# EAGLE board SparkFun_Tranceiver_Breakout-nRF24L01_Panel_v13 (EAGLE 7.4.0), part 1 of 4
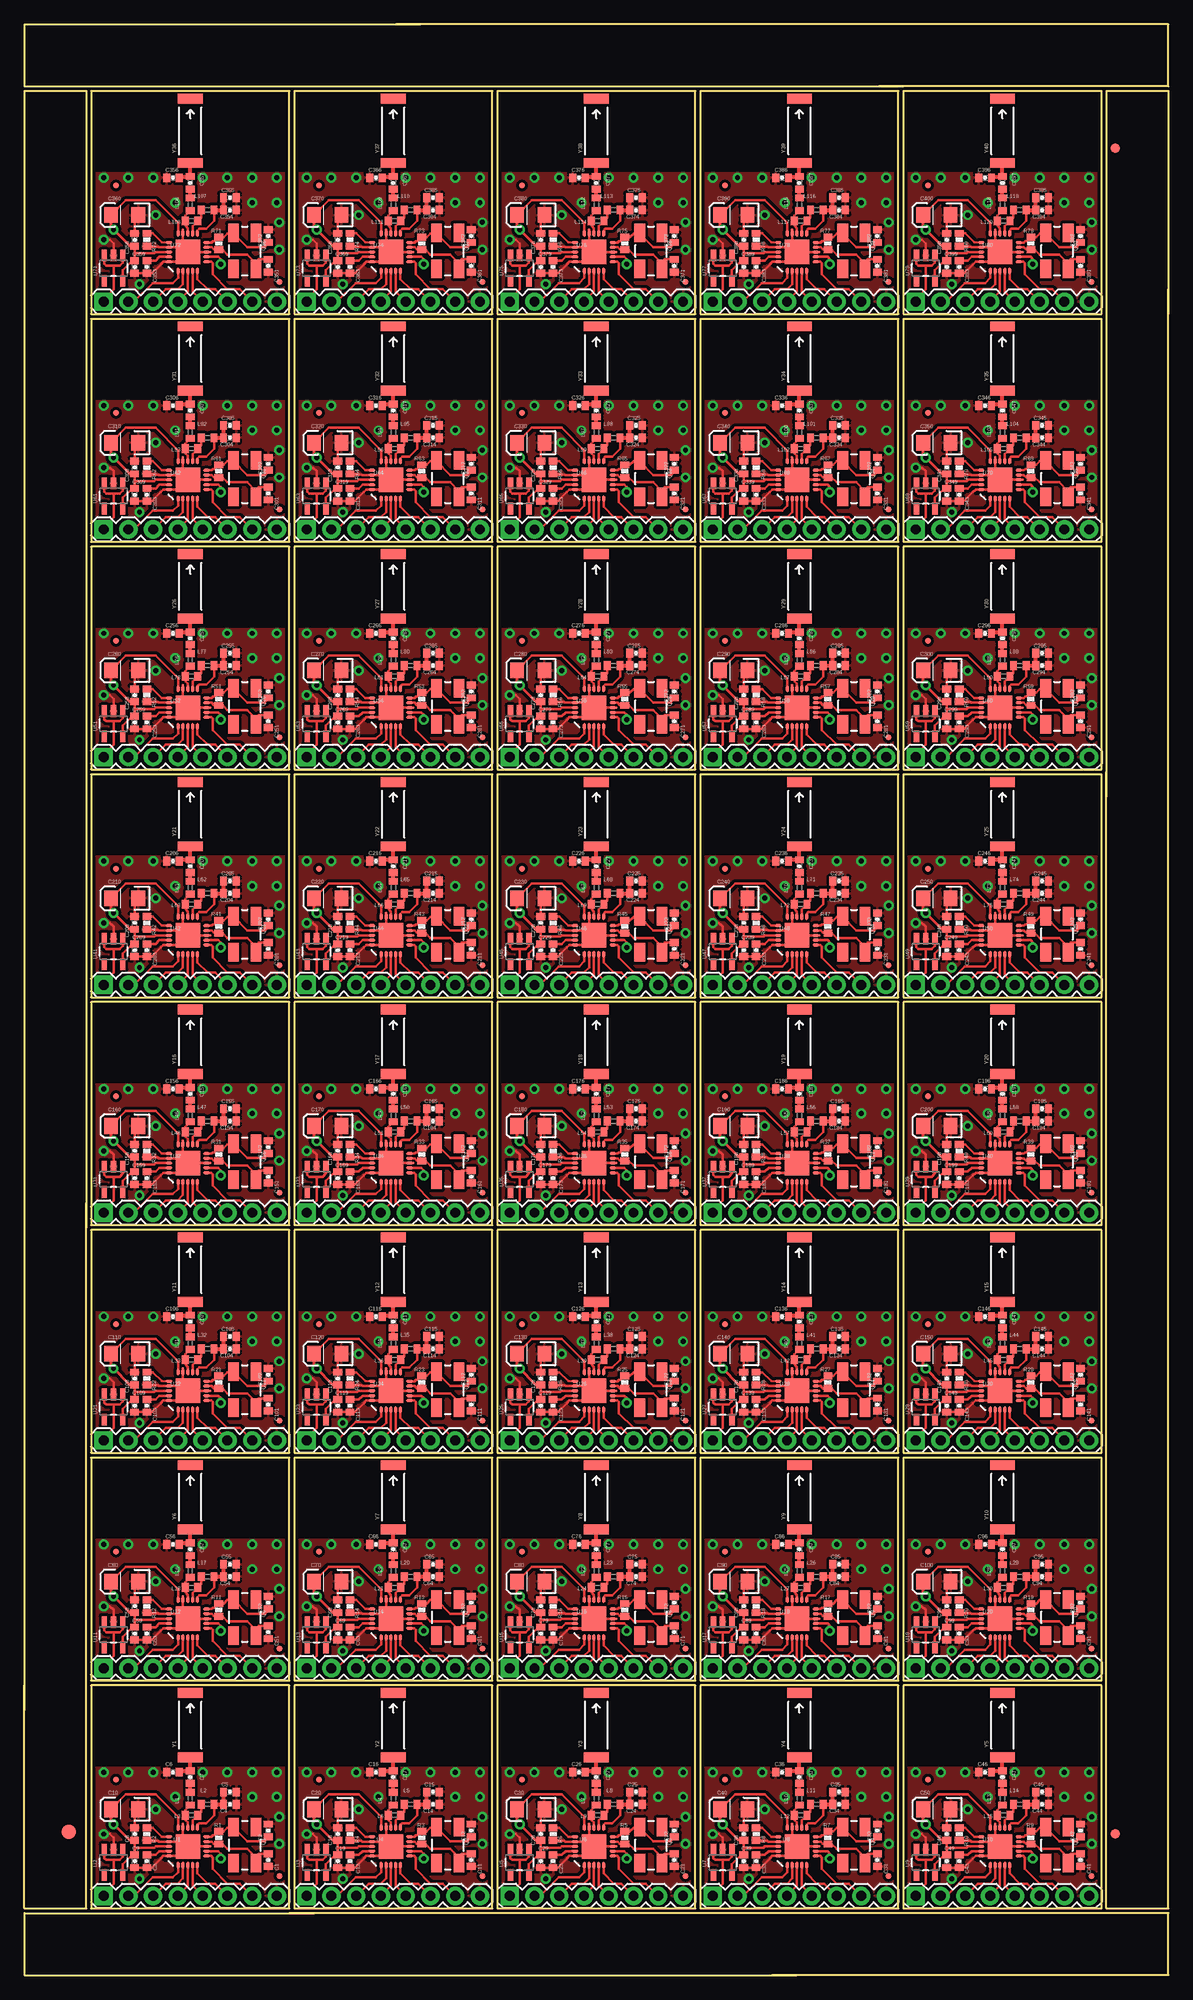
[diagram p0: board, top side]
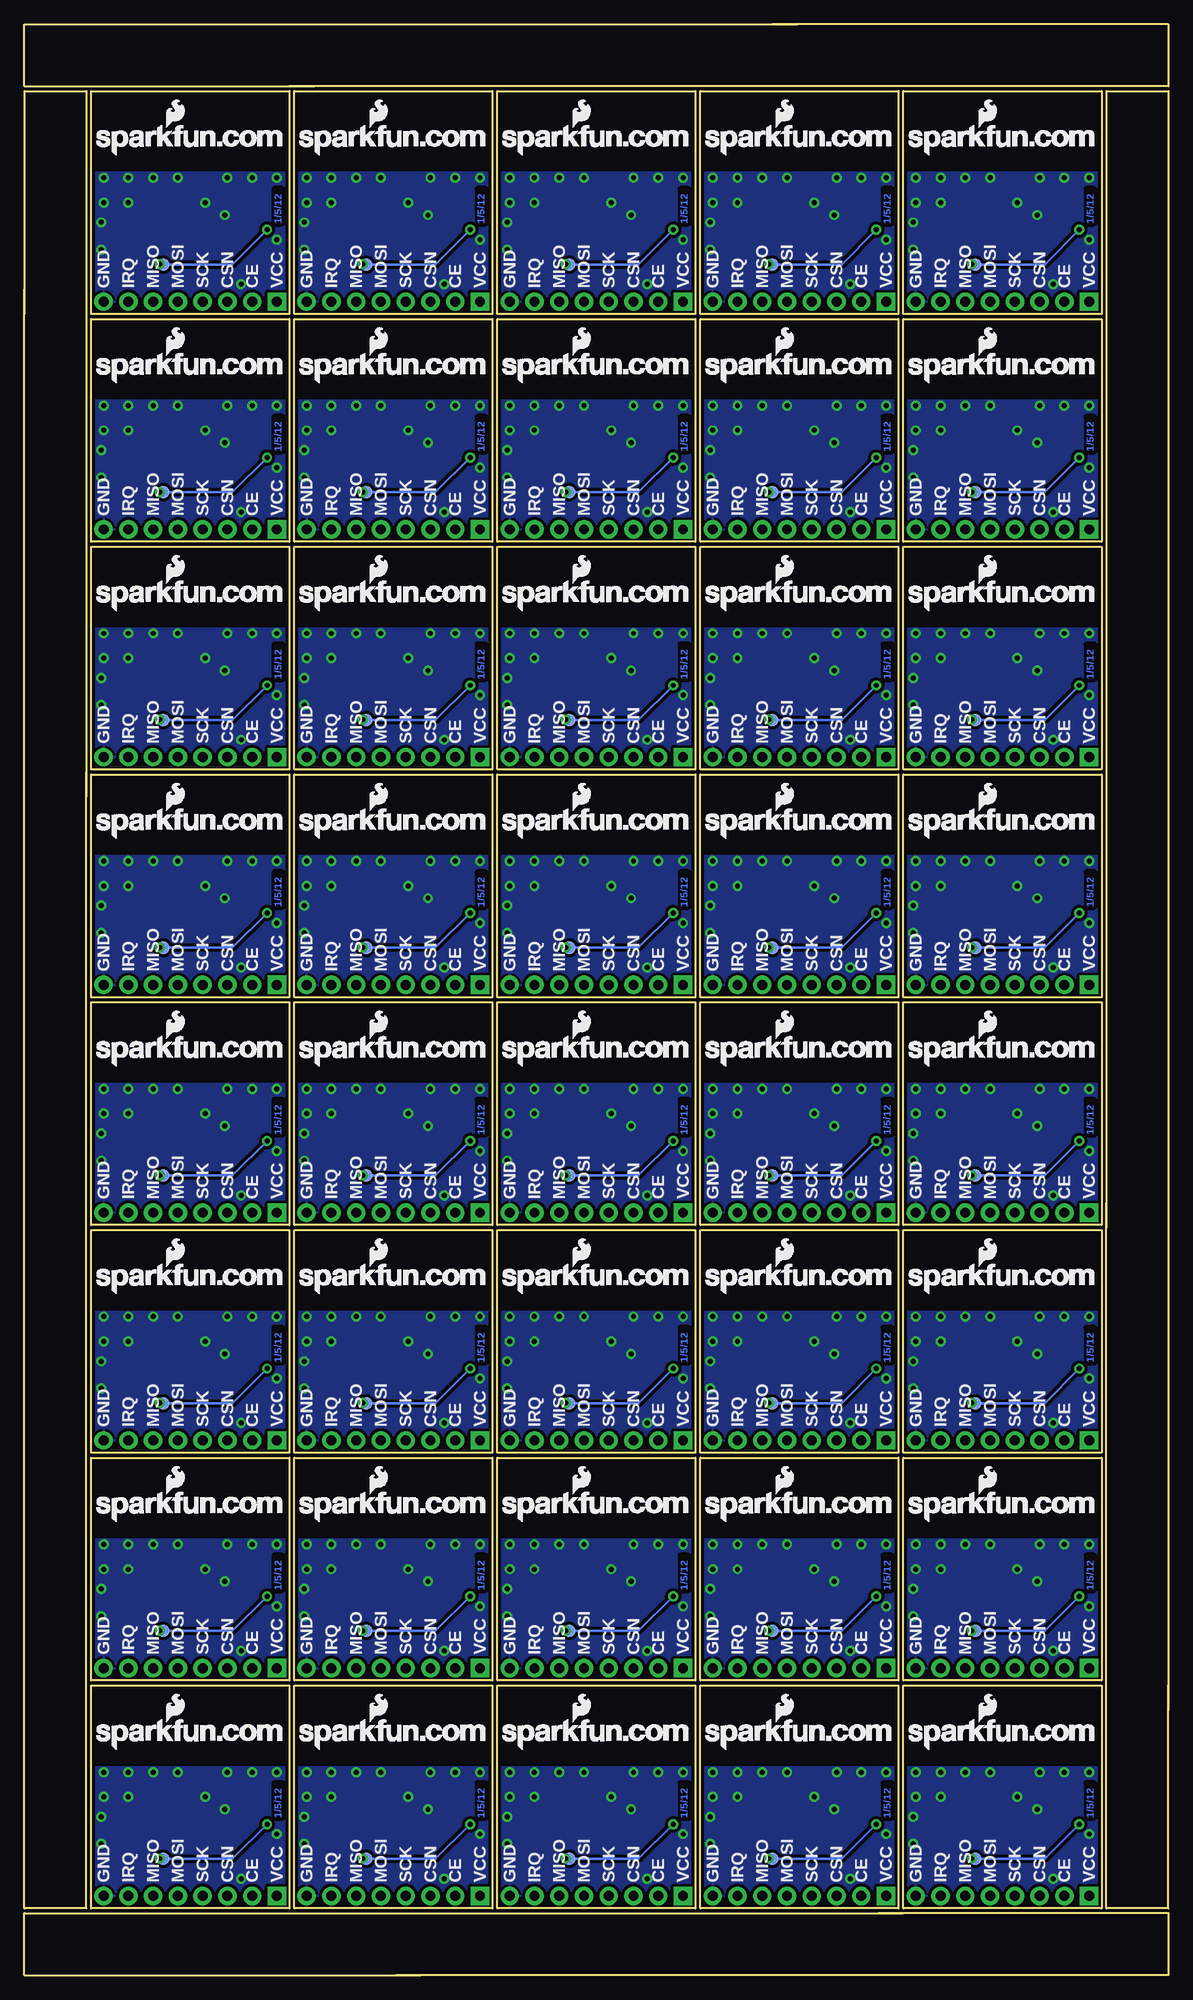
[diagram p1: board, bottom side, seen from below]

Size 117.35 x 200.15 mm. Coordinates in mm from the lower left corner, seen from the top.
Outline: 184 segments
Copper layers (1*16): Top 0.035mm / dielectric 1.5mm / Bottom 0.035mm
Design rules "default": minimum track width 8mil, minimum drill 20mil, track to track 8mil, track to pad 8mil, pad to pad 8mil, via to via 8mil, smd to smd 8mil, copper to edge 8mil, drill to drill 8mil, minimum pad ring 12mil, minimum via ring 10mil, stop-mask expansion 4mil, vias tented up to drill 20mil, thermal gap 10mil
tRestrict: area 14.4,11.9 to 15.2,12.4; area 35.2,11.9 to 36.1,12.4; area 56,11.9 to 56.9,12.4; area 76.8,11.9 to 77.7,12.4; area 97.7,11.9 to 98.6,12.4; area 14.4,35.3 to 15.2,35.8; area 35.2,35.3 to 36.1,35.8; area 56,35.3 to 56.9,35.8; area 76.8,35.3 to 77.7,35.8; area 97.7,35.3 to 98.6,35.8; area 14.4,58.7 to 15.2,59.2; area 35.2,58.7 to 36.1,59.2; 28 more areas

## Footprints (pad centres in the part's own frame; a part is rotated, then mirrored left to right if it is on the bottom)
0402-CAP = smd 0.7 x 0.9: 1 -0.65,0; 2 0.65,0
EIA3216 = smd 1.4 x 1.6: A 1.4,0; C -1.4,0
FIDUCIAL-1.5X3 = smd 1.5 x 1.5: 1 0,0
FIDUCIAL-1X2 = smd 1 x 1: 1 0,0
1X08 = drill 1.016 pad 1.88 square: 1 0,0 | drill 1.016 pad 1.88: 2 2.54,0; 3 5.08,0; 4 7.62,0; 5 10.16,0; 6 12.7,0; 7 15.24,0; 8 17.78,0
MICRO-FIDUCIAL = smd 0.635 x 0.635: 1 0,0
C0402 = smd 0.7 x 0.9: 1 -0.65,0; 2 0.65,0
CRYSTAL-SMD-5X3 = smd 1.9 x 1.1: 1 -1.85,-1.15; 2 1.85,-1.15; 3 1.85,1.15; 4 -1.85,1.15
0402-RES = smd 0.7 x 0.9: 1 -0.65,0; 2 0.65,0
PAD.03X.05 = smd 1.27 x 1.27: P$1 0,0
QFN20_ALT1 = smd 2.515 x 2.515: 0 0,0 | smd 0.686 x 0.293: 1 -1.925,0.986; 2 -1.925,0.493; 3 -1.925,0; 4 -1.925,-0.493; 5 -1.925,-0.986; 11 1.925,-0.986; 12 1.925,-0.493; 13 1.925,0; 14 1.925,0.493; 15 1.925,0.986 | smd 0.293 x 0.686: 6 -0.986,-1.925; 7 -0.493,-1.925; 8 0,-1.925; 9 0.493,-1.925; 10 0.986,-1.925; 16 0.986,1.925; 17 0.493,1.925; 18 0,1.925; 19 -0.493,1.925; 20 -0.986,1.925
SOT23-5 = smd 0.55 x 1.2: 1 -0.95,-1.3; 2 0,-1.3; 3 0.95,-1.3; 4 0.95,1.3; 5 -0.95,1.3
PAD-0.008 = smd 0.203 x 0.203: P$1 0,0
ANTENNA-CHIP5 = smd 1.016 x 2.54: FEED -3.302,0; NC 3.302,0

## Placement (x,y rotation side)
C1  22pF  [0402-CAP]  25.02,11.81 270 top
C2  22pF  [0402-CAP]  25.02,14.86 90 top
C3  33nF  [0402-CAP]  12.57,11.68 270 top
C4  2.2nF  [0402-CAP]  21.08,17.53 0 top
C5  4.7pF  [0402-CAP]  21.08,18.8 0 top
C6  1.0pF  [0402-CAP]  15.24,20.83 0 top
C7  1.5pF  [0402-CAP]  17.02,20.32 90 top
C8  10nF  [0402-CAP]  11.3,14.48 270 top
C9  1nF  [0402-CAP]  11.3,11.68 90 top
C10  10uF  [EIA3216]  10.29,17.02 180 top
C11  22pF  [0402-CAP]  45.85,11.81 270 top
C12  22pF  [0402-CAP]  45.85,14.86 90 top
C13  33nF  [0402-CAP]  33.4,11.68 270 top
C14  2.2nF  [0402-CAP]  41.91,17.53 0 top
C15  4.7pF  [0402-CAP]  41.91,18.8 0 top
C16  1.0pF  [0402-CAP]  36.07,20.83 0 top
C17  1.5pF  [0402-CAP]  37.85,20.32 90 top
C18  10nF  [0402-CAP]  32.13,14.48 270 top
C19  1nF  [0402-CAP]  32.13,11.68 90 top
C20  10uF  [EIA3216]  31.11,17.02 180 top
C21  22pF  [0402-CAP]  66.67,11.81 270 top
C22  22pF  [0402-CAP]  66.67,14.86 90 top
C23  33nF  [0402-CAP]  54.23,11.68 270 top
C24  2.2nF  [0402-CAP]  62.74,17.53 0 top
C25  4.7pF  [0402-CAP]  62.74,18.8 0 top
C26  1.0pF  [0402-CAP]  56.9,20.83 0 top
C27  1.5pF  [0402-CAP]  58.67,20.32 90 top
C28  10nF  [0402-CAP]  52.96,14.48 270 top
C29  1nF  [0402-CAP]  52.96,11.68 90 top
C30  10uF  [EIA3216]  51.94,17.02 180 top
C31  22pF  [0402-CAP]  87.5,11.81 270 top
C32  22pF  [0402-CAP]  87.5,14.86 90 top
C33  33nF  [0402-CAP]  75.06,11.68 270 top
C34  2.2nF  [0402-CAP]  83.57,17.53 0 top
C35  4.7pF  [0402-CAP]  83.57,18.8 0 top
C36  1.0pF  [0402-CAP]  77.72,20.83 0 top
C37  1.5pF  [0402-CAP]  79.5,20.32 90 top
C38  10nF  [0402-CAP]  73.79,14.48 270 top
C39  1nF  [0402-CAP]  73.79,11.68 90 top
C40  10uF  [EIA3216]  72.77,17.02 180 top
C41  22pF  [0402-CAP]  108.33,11.81 270 top
C42  22pF  [0402-CAP]  108.33,14.86 90 top
C43  33nF  [0402-CAP]  95.89,11.68 270 top
C44  2.2nF  [0402-CAP]  104.39,17.53 0 top
C45  4.7pF  [0402-CAP]  104.39,18.8 0 top
C46  1.0pF  [0402-CAP]  98.55,20.83 0 top
C47  1.5pF  [0402-CAP]  100.33,20.32 90 top
C48  10nF  [0402-CAP]  94.61,14.48 270 top
C49  1nF  [0402-CAP]  94.61,11.68 90 top
C50  10uF  [EIA3216]  93.6,17.02 180 top
C51  22pF  [0402-CAP]  25.02,35.18 270 top
C52  22pF  [0402-CAP]  25.02,38.23 90 top
C53  33nF  [0402-CAP]  12.57,35.05 270 top
C54  2.2nF  [0402-CAP]  21.08,40.89 0 top
C55  4.7pF  [0402-CAP]  21.08,42.16 0 top
C56  1.0pF  [0402-CAP]  15.24,44.2 0 top
C57  1.5pF  [0402-CAP]  17.02,43.69 90 top
C58  10nF  [0402-CAP]  11.3,37.85 270 top
C59  1nF  [0402-CAP]  11.3,35.05 90 top
C60  10uF  [EIA3216]  10.29,40.39 180 top
C61  22pF  [0402-CAP]  45.85,35.18 270 top
C62  22pF  [0402-CAP]  45.85,38.23 90 top
C63  33nF  [0402-CAP]  33.4,35.05 270 top
C64  2.2nF  [0402-CAP]  41.91,40.89 0 top
C65  4.7pF  [0402-CAP]  41.91,42.16 0 top
C66  1.0pF  [0402-CAP]  36.07,44.2 0 top
C67  1.5pF  [0402-CAP]  37.85,43.69 90 top
C68  10nF  [0402-CAP]  32.13,37.85 270 top
C69  1nF  [0402-CAP]  32.13,35.05 90 top
C70  10uF  [EIA3216]  31.11,40.39 180 top
C71  22pF  [0402-CAP]  66.67,35.18 270 top
C72  22pF  [0402-CAP]  66.67,38.23 90 top
C73  33nF  [0402-CAP]  54.23,35.05 270 top
C74  2.2nF  [0402-CAP]  62.74,40.89 0 top
C75  4.7pF  [0402-CAP]  62.74,42.16 0 top
C76  1.0pF  [0402-CAP]  56.9,44.2 0 top
C77  1.5pF  [0402-CAP]  58.67,43.69 90 top
C78  10nF  [0402-CAP]  52.96,37.85 270 top
C79  1nF  [0402-CAP]  52.96,35.05 90 top
C80  10uF  [EIA3216]  51.94,40.39 180 top
C81  22pF  [0402-CAP]  87.5,35.18 270 top
C82  22pF  [0402-CAP]  87.5,38.23 90 top
C83  33nF  [0402-CAP]  75.06,35.05 270 top
C84  2.2nF  [0402-CAP]  83.57,40.89 0 top
C85  4.7pF  [0402-CAP]  83.57,42.16 0 top
C86  1.0pF  [0402-CAP]  77.72,44.2 0 top
C87  1.5pF  [0402-CAP]  79.5,43.69 90 top
C88  10nF  [0402-CAP]  73.79,37.85 270 top
C89  1nF  [0402-CAP]  73.79,35.05 90 top
C90  10uF  [EIA3216]  72.77,40.39 180 top
C91  22pF  [0402-CAP]  108.33,35.18 270 top
C92  22pF  [0402-CAP]  108.33,38.23 90 top
C93  33nF  [0402-CAP]  95.89,35.05 270 top
C94  2.2nF  [0402-CAP]  104.39,40.89 0 top
C95  4.7pF  [0402-CAP]  104.39,42.16 0 top
C96  1.0pF  [0402-CAP]  98.55,44.2 0 top
C97  1.5pF  [0402-CAP]  100.33,43.69 90 top
C98  10nF  [0402-CAP]  94.61,37.85 270 top
C99  1nF  [0402-CAP]  94.61,35.05 90 top
C100  10uF  [EIA3216]  93.6,40.39 180 top
C101  22pF  [0402-CAP]  25.02,58.55 270 top
C102  22pF  [0402-CAP]  25.02,61.59 90 top
C103  33nF  [0402-CAP]  12.57,58.42 270 top
C104  2.2nF  [0402-CAP]  21.08,64.26 0 top
C105  4.7pF  [0402-CAP]  21.08,65.53 0 top
C106  1.0pF  [0402-CAP]  15.24,67.56 0 top
C107  1.5pF  [0402-CAP]  17.02,67.05 90 top
C108  10nF  [0402-CAP]  11.3,61.21 270 top
C109  1nF  [0402-CAP]  11.3,58.42 90 top
C110  10uF  [EIA3216]  10.29,63.75 180 top
C111  22pF  [0402-CAP]  45.85,58.55 270 top
C112  22pF  [0402-CAP]  45.85,61.59 90 top
C113  33nF  [0402-CAP]  33.4,58.42 270 top
C114  2.2nF  [0402-CAP]  41.91,64.26 0 top
C115  4.7pF  [0402-CAP]  41.91,65.53 0 top
C116  1.0pF  [0402-CAP]  36.07,67.56 0 top
C117  1.5pF  [0402-CAP]  37.85,67.05 90 top
C118  10nF  [0402-CAP]  32.13,61.21 270 top
C119  1nF  [0402-CAP]  32.13,58.42 90 top
C120  10uF  [EIA3216]  31.11,63.75 180 top
C121  22pF  [0402-CAP]  66.67,58.55 270 top
C122  22pF  [0402-CAP]  66.67,61.59 90 top
C123  33nF  [0402-CAP]  54.23,58.42 270 top
C124  2.2nF  [0402-CAP]  62.74,64.26 0 top
C125  4.7pF  [0402-CAP]  62.74,65.53 0 top
C126  1.0pF  [0402-CAP]  56.9,67.56 0 top
C127  1.5pF  [0402-CAP]  58.67,67.05 90 top
C128  10nF  [0402-CAP]  52.96,61.21 270 top
C129  1nF  [0402-CAP]  52.96,58.42 90 top
C130  10uF  [EIA3216]  51.94,63.75 180 top
C131  22pF  [0402-CAP]  87.5,58.55 270 top
C132  22pF  [0402-CAP]  87.5,61.59 90 top
C133  33nF  [0402-CAP]  75.06,58.42 270 top
C134  2.2nF  [0402-CAP]  83.57,64.26 0 top
C135  4.7pF  [0402-CAP]  83.57,65.53 0 top
C136  1.0pF  [0402-CAP]  77.72,67.56 0 top
C137  1.5pF  [0402-CAP]  79.5,67.05 90 top
C138  10nF  [0402-CAP]  73.79,61.21 270 top
C139  1nF  [0402-CAP]  73.79,58.42 90 top
C140  10uF  [EIA3216]  72.77,63.75 180 top
C141  22pF  [0402-CAP]  108.33,58.55 270 top
C142  22pF  [0402-CAP]  108.33,61.59 90 top
C143  33nF  [0402-CAP]  95.89,58.42 270 top
C144  2.2nF  [0402-CAP]  104.39,64.26 0 top
C145  4.7pF  [0402-CAP]  104.39,65.53 0 top
C146  1.0pF  [0402-CAP]  98.55,67.56 0 top
C147  1.5pF  [0402-CAP]  100.33,67.05 90 top
C148  10nF  [0402-CAP]  94.61,61.21 270 top
C149  1nF  [0402-CAP]  94.61,58.42 90 top
C150  10uF  [EIA3216]  93.6,63.75 180 top
C151  22pF  [0402-CAP]  25.02,81.92 270 top
C152  22pF  [0402-CAP]  25.02,84.96 90 top
C153  33nF  [0402-CAP]  12.57,81.79 270 top
C154  2.2nF  [0402-CAP]  21.08,87.63 0 top
C155  4.7pF  [0402-CAP]  21.08,88.9 0 top
C156  1.0pF  [0402-CAP]  15.24,90.93 0 top
C157  1.5pF  [0402-CAP]  17.02,90.42 90 top
C158  10nF  [0402-CAP]  11.3,84.58 270 top
C159  1nF  [0402-CAP]  11.3,81.79 90 top
C160  10uF  [EIA3216]  10.29,87.12 180 top
C161  22pF  [0402-CAP]  45.85,81.92 270 top
C162  22pF  [0402-CAP]  45.85,84.96 90 top
C163  33nF  [0402-CAP]  33.4,81.79 270 top
C164  2.2nF  [0402-CAP]  41.91,87.63 0 top
C165  4.7pF  [0402-CAP]  41.91,88.9 0 top
C166  1.0pF  [0402-CAP]  36.07,90.93 0 top
C167  1.5pF  [0402-CAP]  37.85,90.42 90 top
C168  10nF  [0402-CAP]  32.13,84.58 270 top
C169  1nF  [0402-CAP]  32.13,81.79 90 top
C170  10uF  [EIA3216]  31.11,87.12 180 top
C171  22pF  [0402-CAP]  66.67,81.92 270 top
C172  22pF  [0402-CAP]  66.67,84.96 90 top
C173  33nF  [0402-CAP]  54.23,81.79 270 top
C174  2.2nF  [0402-CAP]  62.74,87.63 0 top
C175  4.7pF  [0402-CAP]  62.74,88.9 0 top
C176  1.0pF  [0402-CAP]  56.9,90.93 0 top
C177  1.5pF  [0402-CAP]  58.67,90.42 90 top
C178  10nF  [0402-CAP]  52.96,84.58 270 top
C179  1nF  [0402-CAP]  52.96,81.79 90 top
C180  10uF  [EIA3216]  51.94,87.12 180 top
C181  22pF  [0402-CAP]  87.5,81.92 270 top
C182  22pF  [0402-CAP]  87.5,84.96 90 top
C183  33nF  [0402-CAP]  75.06,81.79 270 top
C184  2.2nF  [0402-CAP]  83.57,87.63 0 top
C185  4.7pF  [0402-CAP]  83.57,88.9 0 top
C186  1.0pF  [0402-CAP]  77.72,90.93 0 top
C187  1.5pF  [0402-CAP]  79.5,90.42 90 top
C188  10nF  [0402-CAP]  73.79,84.58 270 top
C189  1nF  [0402-CAP]  73.79,81.79 90 top
C190  10uF  [EIA3216]  72.77,87.12 180 top
C191  22pF  [0402-CAP]  108.33,81.92 270 top
C192  22pF  [0402-CAP]  108.33,84.96 90 top
C193  33nF  [0402-CAP]  95.89,81.79 270 top
C194  2.2nF  [0402-CAP]  104.39,87.63 0 top
C195  4.7pF  [0402-CAP]  104.39,88.9 0 top
C196  1.0pF  [0402-CAP]  98.55,90.93 0 top
C197  1.5pF  [0402-CAP]  100.33,90.42 90 top
C198  10nF  [0402-CAP]  94.61,84.58 270 top
C199  1nF  [0402-CAP]  94.61,81.79 90 top
C200  10uF  [EIA3216]  93.6,87.12 180 top
C201  22pF  [0402-CAP]  25.02,105.28 270 top
C202  22pF  [0402-CAP]  25.02,108.33 90 top
C203  33nF  [0402-CAP]  12.57,105.16 270 top
C204  2.2nF  [0402-CAP]  21.08,111 0 top
C205  4.7pF  [0402-CAP]  21.08,112.27 0 top
C206  1.0pF  [0402-CAP]  15.24,114.3 0 top
C207  1.5pF  [0402-CAP]  17.02,113.79 90 top
C208  10nF  [0402-CAP]  11.3,107.95 270 top
C209  1nF  [0402-CAP]  11.3,105.16 90 top
C210  10uF  [EIA3216]  10.29,110.49 180 top
C211  22pF  [0402-CAP]  45.85,105.28 270 top
C212  22pF  [0402-CAP]  45.85,108.33 90 top
C213  33nF  [0402-CAP]  33.4,105.16 270 top
C214  2.2nF  [0402-CAP]  41.91,111 0 top
C215  4.7pF  [0402-CAP]  41.91,112.27 0 top
C216  1.0pF  [0402-CAP]  36.07,114.3 0 top
C217  1.5pF  [0402-CAP]  37.85,113.79 90 top
C218  10nF  [0402-CAP]  32.13,107.95 270 top
C219  1nF  [0402-CAP]  32.13,105.16 90 top
C220  10uF  [EIA3216]  31.11,110.49 180 top
C221  22pF  [0402-CAP]  66.67,105.28 270 top
C222  22pF  [0402-CAP]  66.67,108.33 90 top
C223  33nF  [0402-CAP]  54.23,105.16 270 top
C224  2.2nF  [0402-CAP]  62.74,111 0 top
C225  4.7pF  [0402-CAP]  62.74,112.27 0 top
C226  1.0pF  [0402-CAP]  56.9,114.3 0 top
C227  1.5pF  [0402-CAP]  58.67,113.79 90 top
C228  10nF  [0402-CAP]  52.96,107.95 270 top
C229  1nF  [0402-CAP]  52.96,105.16 90 top
C230  10uF  [EIA3216]  51.94,110.49 180 top
C231  22pF  [0402-CAP]  87.5,105.28 270 top
C232  22pF  [0402-CAP]  87.5,108.33 90 top
C233  33nF  [0402-CAP]  75.06,105.16 270 top
C234  2.2nF  [0402-CAP]  83.57,111 0 top
C235  4.7pF  [0402-CAP]  83.57,112.27 0 top
C236  1.0pF  [0402-CAP]  77.72,114.3 0 top
C237  1.5pF  [0402-CAP]  79.5,113.79 90 top
C238  10nF  [0402-CAP]  73.79,107.95 270 top
C239  1nF  [0402-CAP]  73.79,105.16 90 top
C240  10uF  [EIA3216]  72.77,110.49 180 top
C241  22pF  [0402-CAP]  108.33,105.28 270 top
C242  22pF  [0402-CAP]  108.33,108.33 90 top
C243  33nF  [0402-CAP]  95.89,105.16 270 top
C244  2.2nF  [0402-CAP]  104.39,111 0 top
C245  4.7pF  [0402-CAP]  104.39,112.27 0 top
C246  1.0pF  [0402-CAP]  98.55,114.3 0 top
C247  1.5pF  [0402-CAP]  100.33,113.79 90 top
C248  10nF  [0402-CAP]  94.61,107.95 270 top
C249  1nF  [0402-CAP]  94.61,105.16 90 top
C250  10uF  [EIA3216]  93.6,110.49 180 top
C251  22pF  [0402-CAP]  25.02,128.65 270 top
C252  22pF  [0402-CAP]  25.02,131.7 90 top
C253  33nF  [0402-CAP]  12.57,128.52 270 top
C254  2.2nF  [0402-CAP]  21.08,134.37 0 top
C255  4.7pF  [0402-CAP]  21.08,135.64 0 top
C256  1.0pF  [0402-CAP]  15.24,137.67 0 top
C257  1.5pF  [0402-CAP]  17.02,137.16 90 top
C258  10nF  [0402-CAP]  11.3,131.32 270 top
C259  1nF  [0402-CAP]  11.3,128.52 90 top
C260  10uF  [EIA3216]  10.29,133.86 180 top
C261  22pF  [0402-CAP]  45.85,128.65 270 top
C262  22pF  [0402-CAP]  45.85,131.7 90 top
C263  33nF  [0402-CAP]  33.4,128.52 270 top
C264  2.2nF  [0402-CAP]  41.91,134.37 0 top
C265  4.7pF  [0402-CAP]  41.91,135.64 0 top
C266  1.0pF  [0402-CAP]  36.07,137.67 0 top
C267  1.5pF  [0402-CAP]  37.85,137.16 90 top
C268  10nF  [0402-CAP]  32.13,131.32 270 top
C269  1nF  [0402-CAP]  32.13,128.52 90 top
C270  10uF  [EIA3216]  31.11,133.86 180 top
C271  22pF  [0402-CAP]  66.67,128.65 270 top
C272  22pF  [0402-CAP]  66.67,131.7 90 top
C273  33nF  [0402-CAP]  54.23,128.52 270 top
C274  2.2nF  [0402-CAP]  62.74,134.37 0 top
C275  4.7pF  [0402-CAP]  62.74,135.64 0 top
C276  1.0pF  [0402-CAP]  56.9,137.67 0 top
C277  1.5pF  [0402-CAP]  58.67,137.16 90 top
C278  10nF  [0402-CAP]  52.96,131.32 270 top
C279  1nF  [0402-CAP]  52.96,128.52 90 top
C280  10uF  [EIA3216]  51.94,133.86 180 top
C281  22pF  [0402-CAP]  87.5,128.65 270 top
C282  22pF  [0402-CAP]  87.5,131.7 90 top
C283  33nF  [0402-CAP]  75.06,128.52 270 top
C284  2.2nF  [0402-CAP]  83.57,134.37 0 top
C285  4.7pF  [0402-CAP]  83.57,135.64 0 top
C286  1.0pF  [0402-CAP]  77.72,137.67 0 top
C287  1.5pF  [0402-CAP]  79.5,137.16 90 top
C288  10nF  [0402-CAP]  73.79,131.32 270 top
C289  1nF  [0402-CAP]  73.79,128.52 90 top
C290  10uF  [EIA3216]  72.77,133.86 180 top
C291  22pF  [0402-CAP]  108.33,128.65 270 top
C292  22pF  [0402-CAP]  108.33,131.7 90 top
C293  33nF  [0402-CAP]  95.89,128.52 270 top
C294  2.2nF  [0402-CAP]  104.39,134.37 0 top
C295  4.7pF  [0402-CAP]  104.39,135.64 0 top
C296  1.0pF  [0402-CAP]  98.55,137.67 0 top
C297  1.5pF  [0402-CAP]  100.33,137.16 90 top
C298  10nF  [0402-CAP]  94.61,131.32 270 top
C299  1nF  [0402-CAP]  94.61,128.52 90 top
C300  10uF  [EIA3216]  93.6,133.86 180 top
C301  22pF  [0402-CAP]  25.02,152.02 270 top
C302  22pF  [0402-CAP]  25.02,155.07 90 top
C303  33nF  [0402-CAP]  12.57,151.89 270 top
C304  2.2nF  [0402-CAP]  21.08,157.73 0 top
C305  4.7pF  [0402-CAP]  21.08,159 0 top
C306  1.0pF  [0402-CAP]  15.24,161.04 0 top
C307  1.5pF  [0402-CAP]  17.02,160.53 90 top
C308  10nF  [0402-CAP]  11.3,154.69 270 top
C309  1nF  [0402-CAP]  11.3,151.89 90 top
C310  10uF  [EIA3216]  10.29,157.23 180 top
C311  22pF  [0402-CAP]  45.85,152.02 270 top
C312  22pF  [0402-CAP]  45.85,155.07 90 top
C313  33nF  [0402-CAP]  33.4,151.89 270 top
C314  2.2nF  [0402-CAP]  41.91,157.73 0 top
C315  4.7pF  [0402-CAP]  41.91,159 0 top
C316  1.0pF  [0402-CAP]  36.07,161.04 0 top
C317  1.5pF  [0402-CAP]  37.85,160.53 90 top
C318  10nF  [0402-CAP]  32.13,154.69 270 top
C319  1nF  [0402-CAP]  32.13,151.89 90 top
C320  10uF  [EIA3216]  31.11,157.23 180 top
C321  22pF  [0402-CAP]  66.67,152.02 270 top
C322  22pF  [0402-CAP]  66.67,155.07 90 top
C323  33nF  [0402-CAP]  54.23,151.89 270 top
C324  2.2nF  [0402-CAP]  62.74,157.73 0 top
C325  4.7pF  [0402-CAP]  62.74,159 0 top
C326  1.0pF  [0402-CAP]  56.9,161.04 0 top
C327  1.5pF  [0402-CAP]  58.67,160.53 90 top
C328  10nF  [0402-CAP]  52.96,154.69 270 top
C329  1nF  [0402-CAP]  52.96,151.89 90 top
C330  10uF  [EIA3216]  51.94,157.23 180 top
C331  22pF  [0402-CAP]  87.5,152.02 270 top
C332  22pF  [0402-CAP]  87.5,155.07 90 top
C333  33nF  [0402-CAP]  75.06,151.89 270 top
C334  2.2nF  [0402-CAP]  83.57,157.73 0 top
C335  4.7pF  [0402-CAP]  83.57,159 0 top
C336  1.0pF  [0402-CAP]  77.72,161.04 0 top
C337  1.5pF  [0402-CAP]  79.5,160.53 90 top
C338  10nF  [0402-CAP]  73.79,154.69 270 top
C339  1nF  [0402-CAP]  73.79,151.89 90 top
C340  10uF  [EIA3216]  72.77,157.23 180 top
C341  22pF  [0402-CAP]  108.33,152.02 270 top
C342  22pF  [0402-CAP]  108.33,155.07 90 top
C343  33nF  [0402-CAP]  95.89,151.89 270 top
C344  2.2nF  [0402-CAP]  104.39,157.73 0 top
C345  4.7pF  [0402-CAP]  104.39,159 0 top
C346  1.0pF  [0402-CAP]  98.55,161.04 0 top
C347  1.5pF  [0402-CAP]  100.33,160.53 90 top
C348  10nF  [0402-CAP]  94.61,154.69 270 top
C349  1nF  [0402-CAP]  94.61,151.89 90 top
C350  10uF  [EIA3216]  93.6,157.23 180 top
C351  22pF  [0402-CAP]  25.02,175.39 270 top
C352  22pF  [0402-CAP]  25.02,178.44 90 top
C353  33nF  [0402-CAP]  12.57,175.26 270 top
C354  2.2nF  [0402-CAP]  21.08,181.1 0 top
C355  4.7pF  [0402-CAP]  21.08,182.37 0 top
C356  1.0pF  [0402-CAP]  15.24,184.4 0 top
C357  1.5pF  [0402-CAP]  17.02,183.89 90 top
C358  10nF  [0402-CAP]  11.3,178.05 270 top
C359  1nF  [0402-CAP]  11.3,175.26 90 top
C360  10uF  [EIA3216]  10.29,180.59 180 top
C361  22pF  [0402-CAP]  45.85,175.39 270 top
C362  22pF  [0402-CAP]  45.85,178.44 90 top
C363  33nF  [0402-CAP]  33.4,175.26 270 top
C364  2.2nF  [0402-CAP]  41.91,181.1 0 top
C365  4.7pF  [0402-CAP]  41.91,182.37 0 top
C366  1.0pF  [0402-CAP]  36.07,184.4 0 top
C367  1.5pF  [0402-CAP]  37.85,183.89 90 top
C368  10nF  [0402-CAP]  32.13,178.05 270 top
C369  1nF  [0402-CAP]  32.13,175.26 90 top
C370  10uF  [EIA3216]  31.11,180.59 180 top
C371  22pF  [0402-CAP]  66.67,175.39 270 top
C372  22pF  [0402-CAP]  66.67,178.44 90 top
C373  33nF  [0402-CAP]  54.23,175.26 270 top
C374  2.2nF  [0402-CAP]  62.74,181.1 0 top
C375  4.7pF  [0402-CAP]  62.74,182.37 0 top
C376  1.0pF  [0402-CAP]  56.9,184.4 0 top
C377  1.5pF  [0402-CAP]  58.67,183.89 90 top
C378  10nF  [0402-CAP]  52.96,178.05 270 top
C379  1nF  [0402-CAP]  52.96,175.26 90 top
C380  10uF  [EIA3216]  51.94,180.59 180 top
C381  22pF  [0402-CAP]  87.5,175.39 270 top
C382  22pF  [0402-CAP]  87.5,178.44 90 top
C383  33nF  [0402-CAP]  75.06,175.26 270 top
C384  2.2nF  [0402-CAP]  83.57,181.1 0 top
C385  4.7pF  [0402-CAP]  83.57,182.37 0 top
C386  1.0pF  [0402-CAP]  77.72,184.4 0 top
C387  1.5pF  [0402-CAP]  79.5,183.89 90 top
C388  10nF  [0402-CAP]  73.79,178.05 270 top
C389  1nF  [0402-CAP]  73.79,175.26 90 top
C390  10uF  [EIA3216]  72.77,180.59 180 top
C391  22pF  [0402-CAP]  108.33,175.39 270 top
C392  22pF  [0402-CAP]  108.33,178.44 90 top
C393  33nF  [0402-CAP]  95.89,175.26 270 top
C394  2.2nF  [0402-CAP]  104.39,181.1 0 top
C395  4.7pF  [0402-CAP]  104.39,182.37 0 top
C396  1.0pF  [0402-CAP]  98.55,184.4 0 top
C397  1.5pF  [0402-CAP]  100.33,183.89 90 top
C398  10nF  [0402-CAP]  94.61,178.05 270 top
C399  1nF  [0402-CAP]  94.61,175.26 90 top
C400  10uF  [EIA3216]  93.6,180.59 180 top
E$1  [FIDUCIAL-1.5X3]  4.57,14.73 0 top
E$7  [FIDUCIAL-1X2]  111.89,187.45 180 top
E$8  [FIDUCIAL-1X2]  111.89,14.48 0 top
JP1  [1X08]  8.13,8.13 0 top
JP2  FIDUCIALUFIDUCIAL  [MICRO-FIDUCIAL]  9.4,20.07 0 top
JP3  FIDUCIALUFIDUCIAL  [MICRO-FIDUCIAL]  26.16,10.16 0 top
JP4  [1X08]  28.96,8.13 0 top
JP5  FIDUCIALUFIDUCIAL  [MICRO-FIDUCIAL]  30.23,20.07 0 top
JP6  FIDUCIALUFIDUCIAL  [MICRO-FIDUCIAL]  46.99,10.16 0 top
JP7  [1X08]  49.78,8.13 0 top
JP8  FIDUCIALUFIDUCIAL  [MICRO-FIDUCIAL]  51.05,20.07 0 top
JP9  FIDUCIALUFIDUCIAL  [MICRO-FIDUCIAL]  67.82,10.16 0 top
JP10  [1X08]  70.61,8.13 0 top
JP11  FIDUCIALUFIDUCIAL  [MICRO-FIDUCIAL]  71.88,20.07 0 top
JP12  FIDUCIALUFIDUCIAL  [MICRO-FIDUCIAL]  88.65,10.16 0 top
JP13  [1X08]  91.44,8.13 0 top
JP14  FIDUCIALUFIDUCIAL  [MICRO-FIDUCIAL]  92.71,20.07 0 top
JP15  FIDUCIALUFIDUCIAL  [MICRO-FIDUCIAL]  109.47,10.16 0 top
JP16  [1X08]  8.13,31.5 0 top
JP17  FIDUCIALUFIDUCIAL  [MICRO-FIDUCIAL]  9.4,43.43 0 top
JP18  FIDUCIALUFIDUCIAL  [MICRO-FIDUCIAL]  26.16,33.53 0 top
JP19  [1X08]  28.96,31.5 0 top
JP20  FIDUCIALUFIDUCIAL  [MICRO-FIDUCIAL]  30.23,43.43 0 top
JP21  FIDUCIALUFIDUCIAL  [MICRO-FIDUCIAL]  46.99,33.53 0 top
JP22  [1X08]  49.78,31.5 0 top
JP23  FIDUCIALUFIDUCIAL  [MICRO-FIDUCIAL]  51.05,43.43 0 top
JP24  FIDUCIALUFIDUCIAL  [MICRO-FIDUCIAL]  67.82,33.53 0 top
JP25  [1X08]  70.61,31.5 0 top
JP26  FIDUCIALUFIDUCIAL  [MICRO-FIDUCIAL]  71.88,43.43 0 top
JP27  FIDUCIALUFIDUCIAL  [MICRO-FIDUCIAL]  88.65,33.53 0 top
JP28  [1X08]  91.44,31.5 0 top
JP29  FIDUCIALUFIDUCIAL  [MICRO-FIDUCIAL]  92.71,43.43 0 top
JP30  FIDUCIALUFIDUCIAL  [MICRO-FIDUCIAL]  109.47,33.53 0 top
JP31  [1X08]  8.13,54.86 0 top
JP32  FIDUCIALUFIDUCIAL  [MICRO-FIDUCIAL]  9.4,66.8 0 top
JP33  FIDUCIALUFIDUCIAL  [MICRO-FIDUCIAL]  26.16,56.9 0 top
JP34  [1X08]  28.96,54.86 0 top
JP35  FIDUCIALUFIDUCIAL  [MICRO-FIDUCIAL]  30.23,66.8 0 top
JP36  FIDUCIALUFIDUCIAL  [MICRO-FIDUCIAL]  46.99,56.9 0 top
JP37  [1X08]  49.78,54.86 0 top
JP38  FIDUCIALUFIDUCIAL  [MICRO-FIDUCIAL]  51.05,66.8 0 top
JP39  FIDUCIALUFIDUCIAL  [MICRO-FIDUCIAL]  67.82,56.9 0 top
JP40  [1X08]  70.61,54.86 0 top
JP41  FIDUCIALUFIDUCIAL  [MICRO-FIDUCIAL]  71.88,66.8 0 top
JP42  FIDUCIALUFIDUCIAL  [MICRO-FIDUCIAL]  88.65,56.9 0 top
JP43  [1X08]  91.44,54.86 0 top
JP44  FIDUCIALUFIDUCIAL  [MICRO-FIDUCIAL]  92.71,66.8 0 top
JP45  FIDUCIALUFIDUCIAL  [MICRO-FIDUCIAL]  109.47,56.9 0 top
JP46  [1X08]  8.13,78.23 0 top
JP47  FIDUCIALUFIDUCIAL  [MICRO-FIDUCIAL]  9.4,90.17 0 top
JP48  FIDUCIALUFIDUCIAL  [MICRO-FIDUCIAL]  26.16,80.26 0 top
JP49  [1X08]  28.96,78.23 0 top
JP50  FIDUCIALUFIDUCIAL  [MICRO-FIDUCIAL]  30.23,90.17 0 top
JP51  FIDUCIALUFIDUCIAL  [MICRO-FIDUCIAL]  46.99,80.26 0 top
JP52  [1X08]  49.78,78.23 0 top
JP53  FIDUCIALUFIDUCIAL  [MICRO-FIDUCIAL]  51.05,90.17 0 top
JP54  FIDUCIALUFIDUCIAL  [MICRO-FIDUCIAL]  67.82,80.26 0 top
JP55  [1X08]  70.61,78.23 0 top
JP56  FIDUCIALUFIDUCIAL  [MICRO-FIDUCIAL]  71.88,90.17 0 top
JP57  FIDUCIALUFIDUCIAL  [MICRO-FIDUCIAL]  88.65,80.26 0 top
JP58  [1X08]  91.44,78.23 0 top
JP59  FIDUCIALUFIDUCIAL  [MICRO-FIDUCIAL]  92.71,90.17 0 top
JP60  FIDUCIALUFIDUCIAL  [MICRO-FIDUCIAL]  109.47,80.26 0 top
JP61  [1X08]  8.13,101.6 0 top
JP62  FIDUCIALUFIDUCIAL  [MICRO-FIDUCIAL]  9.4,113.54 0 top
JP63  FIDUCIALUFIDUCIAL  [MICRO-FIDUCIAL]  26.16,103.63 0 top
JP64  [1X08]  28.96,101.6 0 top
JP65  FIDUCIALUFIDUCIAL  [MICRO-FIDUCIAL]  30.23,113.54 0 top
JP66  FIDUCIALUFIDUCIAL  [MICRO-FIDUCIAL]  46.99,103.63 0 top
JP67  [1X08]  49.78,101.6 0 top
JP68  FIDUCIALUFIDUCIAL  [MICRO-FIDUCIAL]  51.05,113.54 0 top
JP69  FIDUCIALUFIDUCIAL  [MICRO-FIDUCIAL]  67.82,103.63 0 top
JP70  [1X08]  70.61,101.6 0 top
JP71  FIDUCIALUFIDUCIAL  [MICRO-FIDUCIAL]  71.88,113.54 0 top
JP72  FIDUCIALUFIDUCIAL  [MICRO-FIDUCIAL]  88.65,103.63 0 top
JP73  [1X08]  91.44,101.6 0 top
JP74  FIDUCIALUFIDUCIAL  [MICRO-FIDUCIAL]  92.71,113.54 0 top
JP75  FIDUCIALUFIDUCIAL  [MICRO-FIDUCIAL]  109.47,103.63 0 top
JP76  [1X08]  8.13,124.97 0 top
JP77  FIDUCIALUFIDUCIAL  [MICRO-FIDUCIAL]  9.4,136.91 0 top
JP78  FIDUCIALUFIDUCIAL  [MICRO-FIDUCIAL]  26.16,127 0 top
JP79  [1X08]  28.96,124.97 0 top
JP80  FIDUCIALUFIDUCIAL  [MICRO-FIDUCIAL]  30.23,136.91 0 top
JP81  FIDUCIALUFIDUCIAL  [MICRO-FIDUCIAL]  46.99,127 0 top
JP82  [1X08]  49.78,124.97 0 top
JP83  FIDUCIALUFIDUCIAL  [MICRO-FIDUCIAL]  51.05,136.91 0 top
JP84  FIDUCIALUFIDUCIAL  [MICRO-FIDUCIAL]  67.82,127 0 top
JP85  [1X08]  70.61,124.97 0 top
JP86  FIDUCIALUFIDUCIAL  [MICRO-FIDUCIAL]  71.88,136.91 0 top
JP87  FIDUCIALUFIDUCIAL  [MICRO-FIDUCIAL]  88.65,127 0 top
JP88  [1X08]  91.44,124.97 0 top
JP89  FIDUCIALUFIDUCIAL  [MICRO-FIDUCIAL]  92.71,136.91 0 top
JP90  FIDUCIALUFIDUCIAL  [MICRO-FIDUCIAL]  109.47,127 0 top
JP91  [1X08]  8.13,148.34 0 top
JP92  FIDUCIALUFIDUCIAL  [MICRO-FIDUCIAL]  9.4,160.27 0 top
JP93  FIDUCIALUFIDUCIAL  [MICRO-FIDUCIAL]  26.16,150.37 0 top
JP94  [1X08]  28.96,148.34 0 top
JP95  FIDUCIALUFIDUCIAL  [MICRO-FIDUCIAL]  30.23,160.27 0 top
JP96  FIDUCIALUFIDUCIAL  [MICRO-FIDUCIAL]  46.99,150.37 0 top
JP97  [1X08]  49.78,148.34 0 top
JP98  FIDUCIALUFIDUCIAL  [MICRO-FIDUCIAL]  51.05,160.27 0 top
JP99  FIDUCIALUFIDUCIAL  [MICRO-FIDUCIAL]  67.82,150.37 0 top
JP100  [1X08]  70.61,148.34 0 top
JP101  FIDUCIALUFIDUCIAL  [MICRO-FIDUCIAL]  71.88,160.27 0 top
JP102  FIDUCIALUFIDUCIAL  [MICRO-FIDUCIAL]  88.65,150.37 0 top
JP103  [1X08]  91.44,148.34 0 top
JP104  FIDUCIALUFIDUCIAL  [MICRO-FIDUCIAL]  92.71,160.27 0 top
JP105  FIDUCIALUFIDUCIAL  [MICRO-FIDUCIAL]  109.47,150.37 0 top
JP106  [1X08]  8.13,171.7 0 top
JP107  FIDUCIALUFIDUCIAL  [MICRO-FIDUCIAL]  9.4,183.64 0 top
JP108  FIDUCIALUFIDUCIAL  [MICRO-FIDUCIAL]  26.16,173.74 0 top
JP109  [1X08]  28.96,171.7 0 top
JP110  FIDUCIALUFIDUCIAL  [MICRO-FIDUCIAL]  30.23,183.64 0 top
JP111  FIDUCIALUFIDUCIAL  [MICRO-FIDUCIAL]  46.99,173.74 0 top
JP112  [1X08]  49.78,171.7 0 top
JP113  FIDUCIALUFIDUCIAL  [MICRO-FIDUCIAL]  51.05,183.64 0 top
JP114  FIDUCIALUFIDUCIAL  [MICRO-FIDUCIAL]  67.82,173.74 0 top
JP115  [1X08]  70.61,171.7 0 top
JP116  FIDUCIALUFIDUCIAL  [MICRO-FIDUCIAL]  71.88,183.64 0 top
JP117  FIDUCIALUFIDUCIAL  [MICRO-FIDUCIAL]  88.65,173.74 0 top
JP118  [1X08]  91.44,171.7 0 top
JP119  FIDUCIALUFIDUCIAL  [MICRO-FIDUCIAL]  92.71,183.64 0 top
JP120  FIDUCIALUFIDUCIAL  [MICRO-FIDUCIAL]  109.47,173.74 0 top
L1  3.9nH  [C0402]  17.02,18.11 90 top
L2  2.7nH  [C0402]  18.8,17.53 180 top
L3  8.2nH  [C0402]  17.14,16.41 180 top
L4  3.9nH  [C0402]  37.85,18.11 90 top
L5  2.7nH  [C0402]  39.62,17.53 180 top
L6  8.2nH  [C0402]  37.97,16.41 180 top
L7  3.9nH  [C0402]  58.67,18.11 90 top
L8  2.7nH  [C0402]  60.45,17.53 180 top
L9  8.2nH  [C0402]  58.8,16.41 180 top
L10  3.9nH  [C0402]  79.5,18.11 90 top
L11  2.7nH  [C0402]  81.28,17.53 180 top
L12  8.2nH  [C0402]  79.63,16.41 180 top
L13  3.9nH  [C0402]  100.33,18.11 90 top
L14  2.7nH  [C0402]  102.11,17.53 180 top
L15  8.2nH  [C0402]  100.46,16.41 180 top
L16  3.9nH  [C0402]  17.02,41.48 90 top
L17  2.7nH  [C0402]  18.8,40.89 180 top
L18  8.2nH  [C0402]  17.14,39.78 180 top
L19  3.9nH  [C0402]  37.85,41.48 90 top
L20  2.7nH  [C0402]  39.62,40.89 180 top
L21  8.2nH  [C0402]  37.97,39.78 180 top
L22  3.9nH  [C0402]  58.67,41.48 90 top
L23  2.7nH  [C0402]  60.45,40.89 180 top
L24  8.2nH  [C0402]  58.8,39.78 180 top
L25  3.9nH  [C0402]  79.5,41.48 90 top
L26  2.7nH  [C0402]  81.28,40.89 180 top
L27  8.2nH  [C0402]  79.63,39.78 180 top
L28  3.9nH  [C0402]  100.33,41.48 90 top
L29  2.7nH  [C0402]  102.11,40.89 180 top
L30  8.2nH  [C0402]  100.46,39.78 180 top
L31  3.9nH  [C0402]  17.02,64.85 90 top
L32  2.7nH  [C0402]  18.8,64.26 180 top
L33  8.2nH  [C0402]  17.14,63.14 180 top
L34  3.9nH  [C0402]  37.85,64.85 90 top
L35  2.7nH  [C0402]  39.62,64.26 180 top
L36  8.2nH  [C0402]  37.97,63.14 180 top
L37  3.9nH  [C0402]  58.67,64.85 90 top
L38  2.7nH  [C0402]  60.45,64.26 180 top
L39  8.2nH  [C0402]  58.8,63.14 180 top
L40  3.9nH  [C0402]  79.5,64.85 90 top
L41  2.7nH  [C0402]  81.28,64.26 180 top
L42  8.2nH  [C0402]  79.63,63.14 180 top
L43  3.9nH  [C0402]  100.33,64.85 90 top
L44  2.7nH  [C0402]  102.11,64.26 180 top
L45  8.2nH  [C0402]  100.46,63.14 180 top
L46  3.9nH  [C0402]  17.02,88.21 90 top
L47  2.7nH  [C0402]  18.8,87.63 180 top
L48  8.2nH  [C0402]  17.14,86.51 180 top
L49  3.9nH  [C0402]  37.85,88.21 90 top
L50  2.7nH  [C0402]  39.62,87.63 180 top
L51  8.2nH  [C0402]  37.97,86.51 180 top
L52  3.9nH  [C0402]  58.67,88.21 90 top
L53  2.7nH  [C0402]  60.45,87.63 180 top
L54  8.2nH  [C0402]  58.8,86.51 180 top
L55  3.9nH  [C0402]  79.5,88.21 90 top
L56  2.7nH  [C0402]  81.28,87.63 180 top
L57  8.2nH  [C0402]  79.63,86.51 180 top
L58  3.9nH  [C0402]  100.33,88.21 90 top
L59  2.7nH  [C0402]  102.11,87.63 180 top
L60  8.2nH  [C0402]  100.46,86.51 180 top
L61  3.9nH  [C0402]  17.02,111.58 90 top
L62  2.7nH  [C0402]  18.8,111 180 top
L63  8.2nH  [C0402]  17.14,109.88 180 top
L64  3.9nH  [C0402]  37.85,111.58 90 top
L65  2.7nH  [C0402]  39.62,111 180 top
L66  8.2nH  [C0402]  37.97,109.88 180 top
L67  3.9nH  [C0402]  58.67,111.58 90 top
L68  2.7nH  [C0402]  60.45,111 180 top
L69  8.2nH  [C0402]  58.8,109.88 180 top
L70  3.9nH  [C0402]  79.5,111.58 90 top
L71  2.7nH  [C0402]  81.28,111 180 top
L72  8.2nH  [C0402]  79.63,109.88 180 top
L73  3.9nH  [C0402]  100.33,111.58 90 top
L74  2.7nH  [C0402]  102.11,111 180 top
L75  8.2nH  [C0402]  100.46,109.88 180 top
L76  3.9nH  [C0402]  17.02,134.95 90 top
L77  2.7nH  [C0402]  18.8,134.37 180 top
L78  8.2nH  [C0402]  17.14,133.25 180 top
L79  3.9nH  [C0402]  37.85,134.95 90 top
L80  2.7nH  [C0402]  39.62,134.37 180 top
L81  8.2nH  [C0402]  37.97,133.25 180 top
L82  3.9nH  [C0402]  58.67,134.95 90 top
L83  2.7nH  [C0402]  60.45,134.37 180 top
L84  8.2nH  [C0402]  58.8,133.25 180 top
L85  3.9nH  [C0402]  79.5,134.95 90 top
L86  2.7nH  [C0402]  81.28,134.37 180 top
L87  8.2nH  [C0402]  79.63,133.25 180 top
L88  3.9nH  [C0402]  100.33,134.95 90 top
L89  2.7nH  [C0402]  102.11,134.37 180 top
L90  8.2nH  [C0402]  100.46,133.25 180 top
L91  3.9nH  [C0402]  17.02,158.32 90 top
L92  2.7nH  [C0402]  18.8,157.73 180 top
L93  8.2nH  [C0402]  17.14,156.62 180 top
L94  3.9nH  [C0402]  37.85,158.32 90 top
L95  2.7nH  [C0402]  39.62,157.73 180 top
L96  8.2nH  [C0402]  37.97,156.62 180 top
L97  3.9nH  [C0402]  58.67,158.32 90 top
L98  2.7nH  [C0402]  60.45,157.73 180 top
L99  8.2nH  [C0402]  58.8,156.62 180 top
L100  3.9nH  [C0402]  79.5,158.32 90 top
L101  2.7nH  [C0402]  81.28,157.73 180 top
L102  8.2nH  [C0402]  79.63,156.62 180 top
L103  3.9nH  [C0402]  100.33,158.32 90 top
L104  2.7nH  [C0402]  102.11,157.73 180 top
L105  8.2nH  [C0402]  100.46,156.62 180 top
L106  3.9nH  [C0402]  17.02,181.69 90 top
L107  2.7nH  [C0402]  18.8,181.1 180 top
L108  8.2nH  [C0402]  17.14,179.98 180 top
L109  3.9nH  [C0402]  37.85,181.69 90 top
L110  2.7nH  [C0402]  39.62,181.1 180 top
L111  8.2nH  [C0402]  37.97,179.98 180 top
L112  3.9nH  [C0402]  58.67,181.69 90 top
L113  2.7nH  [C0402]  60.45,181.1 180 top
L114  8.2nH  [C0402]  58.8,179.98 180 top
L115  3.9nH  [C0402]  79.5,181.69 90 top
L116  2.7nH  [C0402]  81.28,181.1 180 top
L117  8.2nH  [C0402]  79.63,179.98 180 top
L118  3.9nH  [C0402]  100.33,181.69 90 top
L119  2.7nH  [C0402]  102.11,181.1 180 top
L120  8.2nH  [C0402]  100.46,179.98 180 top
Q1  16MHz  [CRYSTAL-SMD-5X3]  22.61,13.34 90 top
Q2  16MHz  [CRYSTAL-SMD-5X3]  43.43,13.34 90 top
Q3  16MHz  [CRYSTAL-SMD-5X3]  64.26,13.34 90 top
Q4  16MHz  [CRYSTAL-SMD-5X3]  85.09,13.34 90 top
Q5  16MHz  [CRYSTAL-SMD-5X3]  105.92,13.34 90 top
Q6  16MHz  [CRYSTAL-SMD-5X3]  22.61,36.7 90 top
Q7  16MHz  [CRYSTAL-SMD-5X3]  43.43,36.7 90 top
Q8  16MHz  [CRYSTAL-SMD-5X3]  64.26,36.7 90 top
Q9  16MHz  [CRYSTAL-SMD-5X3]  85.09,36.7 90 top
Q10  16MHz  [CRYSTAL-SMD-5X3]  105.92,36.7 90 top
Q11  16MHz  [CRYSTAL-SMD-5X3]  22.61,60.07 90 top
Q12  16MHz  [CRYSTAL-SMD-5X3]  43.43,60.07 90 top
Q13  16MHz  [CRYSTAL-SMD-5X3]  64.26,60.07 90 top
Q14  16MHz  [CRYSTAL-SMD-5X3]  85.09,60.07 90 top
Q15  16MHz  [CRYSTAL-SMD-5X3]  105.92,60.07 90 top
Q16  16MHz  [CRYSTAL-SMD-5X3]  22.61,83.44 90 top
Q17  16MHz  [CRYSTAL-SMD-5X3]  43.43,83.44 90 top
Q18  16MHz  [CRYSTAL-SMD-5X3]  64.26,83.44 90 top
Q19  16MHz  [CRYSTAL-SMD-5X3]  85.09,83.44 90 top
Q20  16MHz  [CRYSTAL-SMD-5X3]  105.92,83.44 90 top
Q21  16MHz  [CRYSTAL-SMD-5X3]  22.61,106.81 90 top
Q22  16MHz  [CRYSTAL-SMD-5X3]  43.43,106.81 90 top
Q23  16MHz  [CRYSTAL-SMD-5X3]  64.26,106.81 90 top
Q24  16MHz  [CRYSTAL-SMD-5X3]  85.09,106.81 90 top
Q25  16MHz  [CRYSTAL-SMD-5X3]  105.92,106.81 90 top
Q26  16MHz  [CRYSTAL-SMD-5X3]  22.61,130.18 90 top
Q27  16MHz  [CRYSTAL-SMD-5X3]  43.43,130.18 90 top
Q28  16MHz  [CRYSTAL-SMD-5X3]  64.26,130.18 90 top
Q29  16MHz  [CRYSTAL-SMD-5X3]  85.09,130.18 90 top
Q30  16MHz  [CRYSTAL-SMD-5X3]  105.92,130.18 90 top
Q31  16MHz  [CRYSTAL-SMD-5X3]  22.61,153.54 90 top
Q32  16MHz  [CRYSTAL-SMD-5X3]  43.43,153.54 90 top
Q33  16MHz  [CRYSTAL-SMD-5X3]  64.26,153.54 90 top
Q34  16MHz  [CRYSTAL-SMD-5X3]  85.09,153.54 90 top
Q35  16MHz  [CRYSTAL-SMD-5X3]  105.92,153.54 90 top
Q36  16MHz  [CRYSTAL-SMD-5X3]  22.61,176.91 90 top
Q37  16MHz  [CRYSTAL-SMD-5X3]  43.43,176.91 90 top
Q38  16MHz  [CRYSTAL-SMD-5X3]  64.26,176.91 90 top
Q39  16MHz  [CRYSTAL-SMD-5X3]  85.09,176.91 90 top
Q40  16MHz  [CRYSTAL-SMD-5X3]  105.92,176.91 90 top
R1  1M  [0402-RES]  19.94,14.1 90 top
R2  22K  [0402-RES]  12.57,14.48 270 top
R3  1M  [0402-RES]  40.77,14.1 90 top
R4  22K  [0402-RES]  33.4,14.48 270 top
R5  1M  [0402-RES]  61.59,14.1 90 top
R6  22K  [0402-RES]  54.23,14.48 270 top
R7  1M  [0402-RES]  82.42,14.1 90 top
R8  22K  [0402-RES]  75.06,14.48 270 top
R9  1M  [0402-RES]  103.25,14.1 90 top
R10  22K  [0402-RES]  95.89,14.48 270 top
R11  1M  [0402-RES]  19.94,37.47 90 top
R12  22K  [0402-RES]  12.57,37.85 270 top
R13  1M  [0402-RES]  40.77,37.47 90 top
R14  22K  [0402-RES]  33.4,37.85 270 top
R15  1M  [0402-RES]  61.59,37.47 90 top
R16  22K  [0402-RES]  54.23,37.85 270 top
R17  1M  [0402-RES]  82.42,37.47 90 top
R18  22K  [0402-RES]  75.06,37.85 270 top
R19  1M  [0402-RES]  103.25,37.47 90 top
R20  22K  [0402-RES]  95.89,37.85 270 top
R21  1M  [0402-RES]  19.94,60.83 90 top
R22  22K  [0402-RES]  12.57,61.21 270 top
R23  1M  [0402-RES]  40.77,60.83 90 top
R24  22K  [0402-RES]  33.4,61.21 270 top
R25  1M  [0402-RES]  61.59,60.83 90 top
R26  22K  [0402-RES]  54.23,61.21 270 top
R27  1M  [0402-RES]  82.42,60.83 90 top
R28  22K  [0402-RES]  75.06,61.21 270 top
R29  1M  [0402-RES]  103.25,60.83 90 top
R30  22K  [0402-RES]  95.89,61.21 270 top
R31  1M  [0402-RES]  19.94,84.2 90 top
R32  22K  [0402-RES]  12.57,84.58 270 top
R33  1M  [0402-RES]  40.77,84.2 90 top
R34  22K  [0402-RES]  33.4,84.58 270 top
R35  1M  [0402-RES]  61.59,84.2 90 top
R36  22K  [0402-RES]  54.23,84.58 270 top
R37  1M  [0402-RES]  82.42,84.2 90 top
R38  22K  [0402-RES]  75.06,84.58 270 top
R39  1M  [0402-RES]  103.25,84.2 90 top
R40  22K  [0402-RES]  95.89,84.58 270 top
R41  1M  [0402-RES]  19.94,107.57 90 top
R42  22K  [0402-RES]  12.57,107.95 270 top
R43  1M  [0402-RES]  40.77,107.57 90 top
R44  22K  [0402-RES]  33.4,107.95 270 top
R45  1M  [0402-RES]  61.59,107.57 90 top
R46  22K  [0402-RES]  54.23,107.95 270 top
R47  1M  [0402-RES]  82.42,107.57 90 top
R48  22K  [0402-RES]  75.06,107.95 270 top
R49  1M  [0402-RES]  103.25,107.57 90 top
R50  22K  [0402-RES]  95.89,107.95 270 top
R51  1M  [0402-RES]  19.94,130.94 90 top
R52  22K  [0402-RES]  12.57,131.32 270 top
R53  1M  [0402-RES]  40.77,130.94 90 top
R54  22K  [0402-RES]  33.4,131.32 270 top
R55  1M  [0402-RES]  61.59,130.94 90 top
R56  22K  [0402-RES]  54.23,131.32 270 top
R57  1M  [0402-RES]  82.42,130.94 90 top
R58  22K  [0402-RES]  75.06,131.32 270 top
R59  1M  [0402-RES]  103.25,130.94 90 top
R60  22K  [0402-RES]  95.89,131.32 270 top
R61  1M  [0402-RES]  19.94,154.31 90 top
R62  22K  [0402-RES]  12.57,154.69 270 top
R63  1M  [0402-RES]  40.77,154.31 90 top
R64  22K  [0402-RES]  33.4,154.69 270 top
R65  1M  [0402-RES]  61.59,154.31 90 top
R66  22K  [0402-RES]  54.23,154.69 270 top
R67  1M  [0402-RES]  82.42,154.31 90 top
R68  22K  [0402-RES]  75.06,154.69 270 top
R69  1M  [0402-RES]  103.25,154.31 90 top
R70  22K  [0402-RES]  95.89,154.69 270 top
R71  1M  [0402-RES]  19.94,177.67 90 top
R72  22K  [0402-RES]  12.57,178.05 270 top
R73  1M  [0402-RES]  40.77,177.67 90 top
R74  22K  [0402-RES]  33.4,178.05 270 top
R75  1M  [0402-RES]  61.59,177.67 90 top
R76  22K  [0402-RES]  54.23,178.05 270 top
R77  1M  [0402-RES]  82.42,177.67 90 top
R78  22K  [0402-RES]  75.06,178.05 270 top
R79  1M  [0402-RES]  103.25,177.67 90 top
R80  22K  [0402-RES]  95.89,178.05 270 top
TP1  [PAD.03X.05]  19.81,11.94 0 bottom
TP2  [PAD.03X.05]  40.64,11.94 0 bottom
TP3  [PAD.03X.05]  61.47,11.94 0 bottom
TP4  [PAD.03X.05]  82.3,11.94 0 bottom
TP5  [PAD.03X.05]  103.12,11.94 0 bottom
TP6  [PAD.03X.05]  19.81,35.31 0 bottom
TP7  [PAD.03X.05]  40.64,35.31 0 bottom
TP8  [PAD.03X.05]  61.47,35.31 0 bottom
TP9  [PAD.03X.05]  82.3,35.31 0 bottom
TP10  [PAD.03X.05]  103.12,35.31 0 bottom
TP11  [PAD.03X.05]  19.81,58.67 0 bottom
TP12  [PAD.03X.05]  40.64,58.67 0 bottom
TP13  [PAD.03X.05]  61.47,58.67 0 bottom
TP14  [PAD.03X.05]  82.3,58.67 0 bottom
TP15  [PAD.03X.05]  103.12,58.67 0 bottom
TP16  [PAD.03X.05]  19.81,82.04 0 bottom
TP17  [PAD.03X.05]  40.64,82.04 0 bottom
TP18  [PAD.03X.05]  61.47,82.04 0 bottom
TP19  [PAD.03X.05]  82.3,82.04 0 bottom
TP20  [PAD.03X.05]  103.12,82.04 0 bottom
TP21  [PAD.03X.05]  19.81,105.41 0 bottom
TP22  [PAD.03X.05]  40.64,105.41 0 bottom
TP23  [PAD.03X.05]  61.47,105.41 0 bottom
TP24  [PAD.03X.05]  82.3,105.41 0 bottom
TP25  [PAD.03X.05]  103.12,105.41 0 bottom
TP26  [PAD.03X.05]  19.81,128.78 0 bottom
TP27  [PAD.03X.05]  40.64,128.78 0 bottom
TP28  [PAD.03X.05]  61.47,128.78 0 bottom
TP29  [PAD.03X.05]  82.3,128.78 0 bottom
TP30  [PAD.03X.05]  103.12,128.78 0 bottom
TP31  [PAD.03X.05]  19.81,152.15 0 bottom
TP32  [PAD.03X.05]  40.64,152.15 0 bottom
TP33  [PAD.03X.05]  61.47,152.15 0 bottom
TP34  [PAD.03X.05]  82.3,152.15 0 bottom
TP35  [PAD.03X.05]  103.12,152.15 0 bottom
TP36  [PAD.03X.05]  19.81,175.51 0 bottom
TP37  [PAD.03X.05]  40.64,175.51 0 bottom
TP38  [PAD.03X.05]  61.47,175.51 0 bottom
TP39  [PAD.03X.05]  82.3,175.51 0 bottom
TP40  [PAD.03X.05]  103.12,175.51 0 bottom
U1  NRF24L01ALT1  [QFN20_ALT1]  16.76,13.21 90 top
U2  3.3V  [SOT23-5]  9.14,11.56 180 top
U3  3.3V  [SOT23-5]  29.97,11.56 180 top
U4  NRF24L01ALT1  [QFN20_ALT1]  37.59,13.21 90 top
U5  3.3V  [SOT23-5]  50.8,11.56 180 top
U6  NRF24L01ALT1  [QFN20_ALT1]  58.42,13.21 90 top
U7  3.3V  [SOT23-5]  71.63,11.56 180 top
U8  NRF24L01ALT1  [QFN20_ALT1]  79.25,13.21 90 top
U9  3.3V  [SOT23-5]  92.46,11.56 180 top
U10  NRF24L01ALT1  [QFN20_ALT1]  100.08,13.21 90 top
U11  3.3V  [SOT23-5]  9.14,34.92 180 top
U12  NRF24L01ALT1  [QFN20_ALT1]  16.76,36.58 90 top
U13  3.3V  [SOT23-5]  29.97,34.92 180 top
U14  NRF24L01ALT1  [QFN20_ALT1]  37.59,36.58 90 top
U15  3.3V  [SOT23-5]  50.8,34.92 180 top
U16  NRF24L01ALT1  [QFN20_ALT1]  58.42,36.58 90 top
U17  3.3V  [SOT23-5]  71.63,34.92 180 top
U18  NRF24L01ALT1  [QFN20_ALT1]  79.25,36.58 90 top
U19  3.3V  [SOT23-5]  92.46,34.92 180 top
U20  NRF24L01ALT1  [QFN20_ALT1]  100.08,36.58 90 top
U21  3.3V  [SOT23-5]  9.14,58.29 180 top
U22  NRF24L01ALT1  [QFN20_ALT1]  16.76,59.94 90 top
U23  3.3V  [SOT23-5]  29.97,58.29 180 top
U24  NRF24L01ALT1  [QFN20_ALT1]  37.59,59.94 90 top
U25  3.3V  [SOT23-5]  50.8,58.29 180 top
U26  NRF24L01ALT1  [QFN20_ALT1]  58.42,59.94 90 top
U27  3.3V  [SOT23-5]  71.63,58.29 180 top
U28  NRF24L01ALT1  [QFN20_ALT1]  79.25,59.94 90 top
U29  3.3V  [SOT23-5]  92.46,58.29 180 top
U30  NRF24L01ALT1  [QFN20_ALT1]  100.08,59.94 90 top
U31  3.3V  [SOT23-5]  9.14,81.66 180 top
U32  NRF24L01ALT1  [QFN20_ALT1]  16.76,83.31 90 top
U33  3.3V  [SOT23-5]  29.97,81.66 180 top
U34  NRF24L01ALT1  [QFN20_ALT1]  37.59,83.31 90 top
U35  3.3V  [SOT23-5]  50.8,81.66 180 top
U36  NRF24L01ALT1  [QFN20_ALT1]  58.42,83.31 90 top
U37  3.3V  [SOT23-5]  71.63,81.66 180 top
U38  NRF24L01ALT1  [QFN20_ALT1]  79.25,83.31 90 top
U39  3.3V  [SOT23-5]  92.46,81.66 180 top
U40  NRF24L01ALT1  [QFN20_ALT1]  100.08,83.31 90 top
U41  3.3V  [SOT23-5]  9.14,105.03 180 top
U42  NRF24L01ALT1  [QFN20_ALT1]  16.76,106.68 90 top
U43  3.3V  [SOT23-5]  29.97,105.03 180 top
U44  NRF24L01ALT1  [QFN20_ALT1]  37.59,106.68 90 top
U45  3.3V  [SOT23-5]  50.8,105.03 180 top
U46  NRF24L01ALT1  [QFN20_ALT1]  58.42,106.68 90 top
U47  3.3V  [SOT23-5]  71.63,105.03 180 top
U48  NRF24L01ALT1  [QFN20_ALT1]  79.25,106.68 90 top
U49  3.3V  [SOT23-5]  92.46,105.03 180 top
U50  NRF24L01ALT1  [QFN20_ALT1]  100.08,106.68 90 top
U51  3.3V  [SOT23-5]  9.14,128.4 180 top
U52  NRF24L01ALT1  [QFN20_ALT1]  16.76,130.05 90 top
U53  3.3V  [SOT23-5]  29.97,128.4 180 top
U54  NRF24L01ALT1  [QFN20_ALT1]  37.59,130.05 90 top
U55  3.3V  [SOT23-5]  50.8,128.4 180 top
U56  NRF24L01ALT1  [QFN20_ALT1]  58.42,130.05 90 top
U57  3.3V  [SOT23-5]  71.63,128.4 180 top
U58  NRF24L01ALT1  [QFN20_ALT1]  79.25,130.05 90 top
U59  3.3V  [SOT23-5]  92.46,128.4 180 top
U60  NRF24L01ALT1  [QFN20_ALT1]  100.08,130.05 90 top
U61  3.3V  [SOT23-5]  9.14,151.76 180 top
U62  NRF24L01ALT1  [QFN20_ALT1]  16.76,153.42 90 top
U63  3.3V  [SOT23-5]  29.97,151.76 180 top
U64  NRF24L01ALT1  [QFN20_ALT1]  37.59,153.42 90 top
U65  3.3V  [SOT23-5]  50.8,151.76 180 top
U66  NRF24L01ALT1  [QFN20_ALT1]  58.42,153.42 90 top
U67  3.3V  [SOT23-5]  71.63,151.76 180 top
U68  NRF24L01ALT1  [QFN20_ALT1]  79.25,153.42 90 top
U69  3.3V  [SOT23-5]  92.46,151.76 180 top
U70  NRF24L01ALT1  [QFN20_ALT1]  100.08,153.42 90 top
U71  3.3V  [SOT23-5]  9.14,175.13 180 top
U72  NRF24L01ALT1  [QFN20_ALT1]  16.76,176.78 90 top
U73  3.3V  [SOT23-5]  29.97,175.13 180 top
U74  NRF24L01ALT1  [QFN20_ALT1]  37.59,176.78 90 top
U75  3.3V  [SOT23-5]  50.8,175.13 180 top
U76  NRF24L01ALT1  [QFN20_ALT1]  58.42,176.78 90 top
U77  3.3V  [SOT23-5]  71.63,175.13 180 top
U78  NRF24L01ALT1  [QFN20_ALT1]  79.25,176.78 90 top
U79  3.3V  [SOT23-5]  92.46,175.13 180 top
U80  NRF24L01ALT1  [QFN20_ALT1]  100.08,176.78 90 top
U$1  PAD  [PAD-0.008]  16.26,15.52 0 top
U$2  LOGO-SFENEW  [SFE-NEW-WEBLOGO]  47.5,23.11 0 bottom
U$3  PAD  [PAD-0.008]  37.08,15.52 0 top
U$4  PAD  [PAD-0.008]  19.08,13.21 0 top
U$5  LOGO-SFENEW  [SFE-NEW-WEBLOGO]  26.67,23.11 0 bottom
U$6  PAD  [PAD-0.008]  39.9,13.21 0 top
U$7  LOGO-SFENEW  [SFE-NEW-WEBLOGO]  68.33,23.11 0 bottom
U$8  PAD  [PAD-0.008]  57.91,15.52 0 top
U$9  PAD  [PAD-0.008]  60.73,13.21 0 top
U$10  LOGO-SFENEW  [SFE-NEW-WEBLOGO]  89.15,23.11 0 bottom
U$11  PAD  [PAD-0.008]  78.74,15.52 0 top
U$12  PAD  [PAD-0.008]  81.56,13.21 0 top
U$13  LOGO-SFENEW  [SFE-NEW-WEBLOGO]  109.98,23.11 0 bottom
U$14  PAD  [PAD-0.008]  99.57,15.52 0 top
U$15  PAD  [PAD-0.008]  102.39,13.21 0 top
U$16  LOGO-SFENEW  [SFE-NEW-WEBLOGO]  26.67,46.48 0 bottom
U$17  PAD  [PAD-0.008]  16.26,38.89 0 top
U$18  PAD  [PAD-0.008]  19.08,36.58 0 top
U$19  LOGO-SFENEW  [SFE-NEW-WEBLOGO]  47.5,46.48 0 bottom
U$20  PAD  [PAD-0.008]  37.08,38.89 0 top
U$21  PAD  [PAD-0.008]  39.9,36.58 0 top
U$22  LOGO-SFENEW  [SFE-NEW-WEBLOGO]  68.33,46.48 0 bottom
U$23  PAD  [PAD-0.008]  57.91,38.89 0 top
U$24  PAD  [PAD-0.008]  60.73,36.58 0 top
U$25  LOGO-SFENEW  [SFE-NEW-WEBLOGO]  89.15,46.48 0 bottom
U$26  PAD  [PAD-0.008]  78.74,38.89 0 top
U$27  PAD  [PAD-0.008]  81.56,36.58 0 top
U$28  LOGO-SFENEW  [SFE-NEW-WEBLOGO]  109.98,46.48 0 bottom
U$29  PAD  [PAD-0.008]  99.57,38.89 0 top
U$30  PAD  [PAD-0.008]  102.39,36.58 0 top
U$31  LOGO-SFENEW  [SFE-NEW-WEBLOGO]  26.67,69.85 0 bottom
U$32  PAD  [PAD-0.008]  16.26,62.26 0 top
U$33  PAD  [PAD-0.008]  19.08,59.94 0 top
U$34  LOGO-SFENEW  [SFE-NEW-WEBLOGO]  47.5,69.85 0 bottom
U$35  PAD  [PAD-0.008]  37.08,62.26 0 top
U$36  PAD  [PAD-0.008]  39.9,59.94 0 top
U$37  LOGO-SFENEW  [SFE-NEW-WEBLOGO]  68.33,69.85 0 bottom
U$38  PAD  [PAD-0.008]  57.91,62.26 0 top
U$39  PAD  [PAD-0.008]  60.73,59.94 0 top
U$40  LOGO-SFENEW  [SFE-NEW-WEBLOGO]  89.15,69.85 0 bottom
U$41  PAD  [PAD-0.008]  78.74,62.26 0 top
U$42  PAD  [PAD-0.008]  81.56,59.94 0 top
U$43  LOGO-SFENEW  [SFE-NEW-WEBLOGO]  109.98,69.85 0 bottom
U$44  PAD  [PAD-0.008]  99.57,62.26 0 top
U$45  PAD  [PAD-0.008]  102.39,59.94 0 top
U$46  LOGO-SFENEW  [SFE-NEW-WEBLOGO]  26.67,93.22 0 bottom
U$47  PAD  [PAD-0.008]  16.26,85.62 0 top
U$48  PAD  [PAD-0.008]  19.08,83.31 0 top
U$49  LOGO-SFENEW  [SFE-NEW-WEBLOGO]  47.5,93.22 0 bottom
U$50  PAD  [PAD-0.008]  37.08,85.62 0 top
U$51  PAD  [PAD-0.008]  39.9,83.31 0 top
U$52  LOGO-SFENEW  [SFE-NEW-WEBLOGO]  68.33,93.22 0 bottom
U$53  PAD  [PAD-0.008]  57.91,85.62 0 top
U$54  PAD  [PAD-0.008]  60.73,83.31 0 top
U$55  LOGO-SFENEW  [SFE-NEW-WEBLOGO]  89.15,93.22 0 bottom
U$56  PAD  [PAD-0.008]  78.74,85.62 0 top
U$57  PAD  [PAD-0.008]  81.56,83.31 0 top
U$58  LOGO-SFENEW  [SFE-NEW-WEBLOGO]  109.98,93.22 0 bottom
U$59  PAD  [PAD-0.008]  99.57,85.62 0 top
U$60  PAD  [PAD-0.008]  102.39,83.31 0 top
U$61  LOGO-SFENEW  [SFE-NEW-WEBLOGO]  26.67,116.59 0 bottom
U$62  PAD  [PAD-0.008]  16.26,108.99 0 top
U$63  PAD  [PAD-0.008]  19.08,106.68 0 top
U$64  LOGO-SFENEW  [SFE-NEW-WEBLOGO]  47.5,116.59 0 bottom
U$65  PAD  [PAD-0.008]  37.08,108.99 0 top
U$66  PAD  [PAD-0.008]  39.9,106.68 0 top
U$67  LOGO-SFENEW  [SFE-NEW-WEBLOGO]  68.33,116.59 0 bottom
U$68  PAD  [PAD-0.008]  57.91,108.99 0 top
U$69  PAD  [PAD-0.008]  60.73,106.68 0 top
U$70  LOGO-SFENEW  [SFE-NEW-WEBLOGO]  89.15,116.59 0 bottom
U$71  PAD  [PAD-0.008]  78.74,108.99 0 top
U$72  PAD  [PAD-0.008]  81.56,106.68 0 top
U$73  LOGO-SFENEW  [SFE-NEW-WEBLOGO]  109.98,116.59 0 bottom
U$74  PAD  [PAD-0.008]  99.57,108.99 0 top
U$75  PAD  [PAD-0.008]  102.39,106.68 0 top
U$76  LOGO-SFENEW  [SFE-NEW-WEBLOGO]  26.67,139.95 0 bottom
U$77  PAD  [PAD-0.008]  16.26,132.36 0 top
U$78  PAD  [PAD-0.008]  19.08,130.05 0 top
U$79  LOGO-SFENEW  [SFE-NEW-WEBLOGO]  47.5,139.95 0 bottom
U$80  PAD  [PAD-0.008]  37.08,132.36 0 top
U$81  PAD  [PAD-0.008]  39.9,130.05 0 top
U$82  LOGO-SFENEW  [SFE-NEW-WEBLOGO]  68.33,139.95 0 bottom
U$83  PAD  [PAD-0.008]  57.91,132.36 0 top
U$84  PAD  [PAD-0.008]  60.73,130.05 0 top
U$85  LOGO-SFENEW  [SFE-NEW-WEBLOGO]  89.15,139.95 0 bottom
U$86  PAD  [PAD-0.008]  78.74,132.36 0 top
U$87  PAD  [PAD-0.008]  81.56,130.05 0 top
U$88  LOGO-SFENEW  [SFE-NEW-WEBLOGO]  109.98,139.95 0 bottom
U$89  PAD  [PAD-0.008]  99.57,132.36 0 top
U$90  PAD  [PAD-0.008]  102.39,130.05 0 top
U$91  LOGO-SFENEW  [SFE-NEW-WEBLOGO]  26.67,163.32 0 bottom
U$92  PAD  [PAD-0.008]  16.26,155.73 0 top
U$93  PAD  [PAD-0.008]  19.08,153.42 0 top
U$94  LOGO-SFENEW  [SFE-NEW-WEBLOGO]  47.5,163.32 0 bottom
U$95  PAD  [PAD-0.008]  37.08,155.73 0 top
U$96  PAD  [PAD-0.008]  39.9,153.42 0 top
U$97  LOGO-SFENEW  [SFE-NEW-WEBLOGO]  68.33,163.32 0 bottom
U$98  PAD  [PAD-0.008]  57.91,155.73 0 top
U$99  PAD  [PAD-0.008]  60.73,153.42 0 top
U$100  LOGO-SFENEW  [SFE-NEW-WEBLOGO]  89.15,163.32 0 bottom
U$101  PAD  [PAD-0.008]  78.74,155.73 0 top
U$102  PAD  [PAD-0.008]  81.56,153.42 0 top
U$103  LOGO-SFENEW  [SFE-NEW-WEBLOGO]  109.98,163.32 0 bottom
U$104  PAD  [PAD-0.008]  99.57,155.73 0 top
U$105  PAD  [PAD-0.008]  102.39,153.42 0 top
U$106  LOGO-SFENEW  [SFE-NEW-WEBLOGO]  26.67,186.69 0 bottom
U$107  PAD  [PAD-0.008]  16.26,179.1 0 top
U$108  PAD  [PAD-0.008]  19.08,176.78 0 top
U$109  LOGO-SFENEW  [SFE-NEW-WEBLOGO]  47.5,186.69 0 bottom
U$110  PAD  [PAD-0.008]  37.08,179.1 0 top
U$111  PAD  [PAD-0.008]  39.9,176.78 0 top
U$112  LOGO-SFENEW  [SFE-NEW-WEBLOGO]  68.33,186.69 0 bottom
U$113  PAD  [PAD-0.008]  57.91,179.1 0 top
U$114  PAD  [PAD-0.008]  60.73,176.78 0 top
U$115  LOGO-SFENEW  [SFE-NEW-WEBLOGO]  89.15,186.69 0 bottom
U$116  PAD  [PAD-0.008]  78.74,179.1 0 top
U$117  PAD  [PAD-0.008]  81.56,176.78 0 top
U$118  LOGO-SFENEW  [SFE-NEW-WEBLOGO]  109.98,186.69 0 bottom
U$119  PAD  [PAD-0.008]  99.57,179.1 0 top
U$120  PAD  [PAD-0.008]  102.39,176.78 0 top
Y1  ANTENNA2SMD5  [ANTENNA-CHIP5]  17.02,25.65 90 top
Y2  ANTENNA2SMD5  [ANTENNA-CHIP5]  37.85,25.65 90 top
Y3  ANTENNA2SMD5  [ANTENNA-CHIP5]  58.67,25.65 90 top
Y4  ANTENNA2SMD5  [ANTENNA-CHIP5]  79.5,25.65 90 top
Y5  ANTENNA2SMD5  [ANTENNA-CHIP5]  100.33,25.65 90 top
Y6  ANTENNA2SMD5  [ANTENNA-CHIP5]  17.02,49.02 90 top
Y7  ANTENNA2SMD5  [ANTENNA-CHIP5]  37.85,49.02 90 top
Y8  ANTENNA2SMD5  [ANTENNA-CHIP5]  58.67,49.02 90 top
Y9  ANTENNA2SMD5  [ANTENNA-CHIP5]  79.5,49.02 90 top
Y10  ANTENNA2SMD5  [ANTENNA-CHIP5]  100.33,49.02 90 top
Y11  ANTENNA2SMD5  [ANTENNA-CHIP5]  17.02,72.39 90 top
Y12  ANTENNA2SMD5  [ANTENNA-CHIP5]  37.85,72.39 90 top
Y13  ANTENNA2SMD5  [ANTENNA-CHIP5]  58.67,72.39 90 top
Y14  ANTENNA2SMD5  [ANTENNA-CHIP5]  79.5,72.39 90 top
Y15  ANTENNA2SMD5  [ANTENNA-CHIP5]  100.33,72.39 90 top
Y16  ANTENNA2SMD5  [ANTENNA-CHIP5]  17.02,95.76 90 top
Y17  ANTENNA2SMD5  [ANTENNA-CHIP5]  37.85,95.76 90 top
Y18  ANTENNA2SMD5  [ANTENNA-CHIP5]  58.67,95.76 90 top
Y19  ANTENNA2SMD5  [ANTENNA-CHIP5]  79.5,95.76 90 top
Y20  ANTENNA2SMD5  [ANTENNA-CHIP5]  100.33,95.76 90 top
Y21  ANTENNA2SMD5  [ANTENNA-CHIP5]  17.02,119.13 90 top
Y22  ANTENNA2SMD5  [ANTENNA-CHIP5]  37.85,119.13 90 top
Y23  ANTENNA2SMD5  [ANTENNA-CHIP5]  58.67,119.13 90 top
Y24  ANTENNA2SMD5  [ANTENNA-CHIP5]  79.5,119.13 90 top
Y25  ANTENNA2SMD5  [ANTENNA-CHIP5]  100.33,119.13 90 top
Y26  ANTENNA2SMD5  [ANTENNA-CHIP5]  17.02,142.49 90 top
Y27  ANTENNA2SMD5  [ANTENNA-CHIP5]  37.85,142.49 90 top
Y28  ANTENNA2SMD5  [ANTENNA-CHIP5]  58.67,142.49 90 top
Y29  ANTENNA2SMD5  [ANTENNA-CHIP5]  79.5,142.49 90 top
Y30  ANTENNA2SMD5  [ANTENNA-CHIP5]  100.33,142.49 90 top
Y31  ANTENNA2SMD5  [ANTENNA-CHIP5]  17.02,165.86 90 top
Y32  ANTENNA2SMD5  [ANTENNA-CHIP5]  37.85,165.86 90 top
Y33  ANTENNA2SMD5  [ANTENNA-CHIP5]  58.67,165.86 90 top
Y34  ANTENNA2SMD5  [ANTENNA-CHIP5]  79.5,165.86 90 top
Y35  ANTENNA2SMD5  [ANTENNA-CHIP5]  100.33,165.86 90 top
Y36  ANTENNA2SMD5  [ANTENNA-CHIP5]  17.02,189.23 90 top
Y37  ANTENNA2SMD5  [ANTENNA-CHIP5]  37.85,189.23 90 top
Y38  ANTENNA2SMD5  [ANTENNA-CHIP5]  58.67,189.23 90 top
Y39  ANTENNA2SMD5  [ANTENNA-CHIP5]  79.5,189.23 90 top
Y40  ANTENNA2SMD5  [ANTENNA-CHIP5]  100.33,189.23 90 top